# Altium PCB RIO_rev1.PcbDoc
Units mil, origin at the board's own origin, x right, y up, seen from the top; angles counter-clockwise.
Board outline 3937.01 x 3937.01 mil, 4 copper layers (Top, Plane 1, Plane 2, Bottom), stack 59.291 mil thick; 2 components, 147 nets, 4 pads, 0 vias.
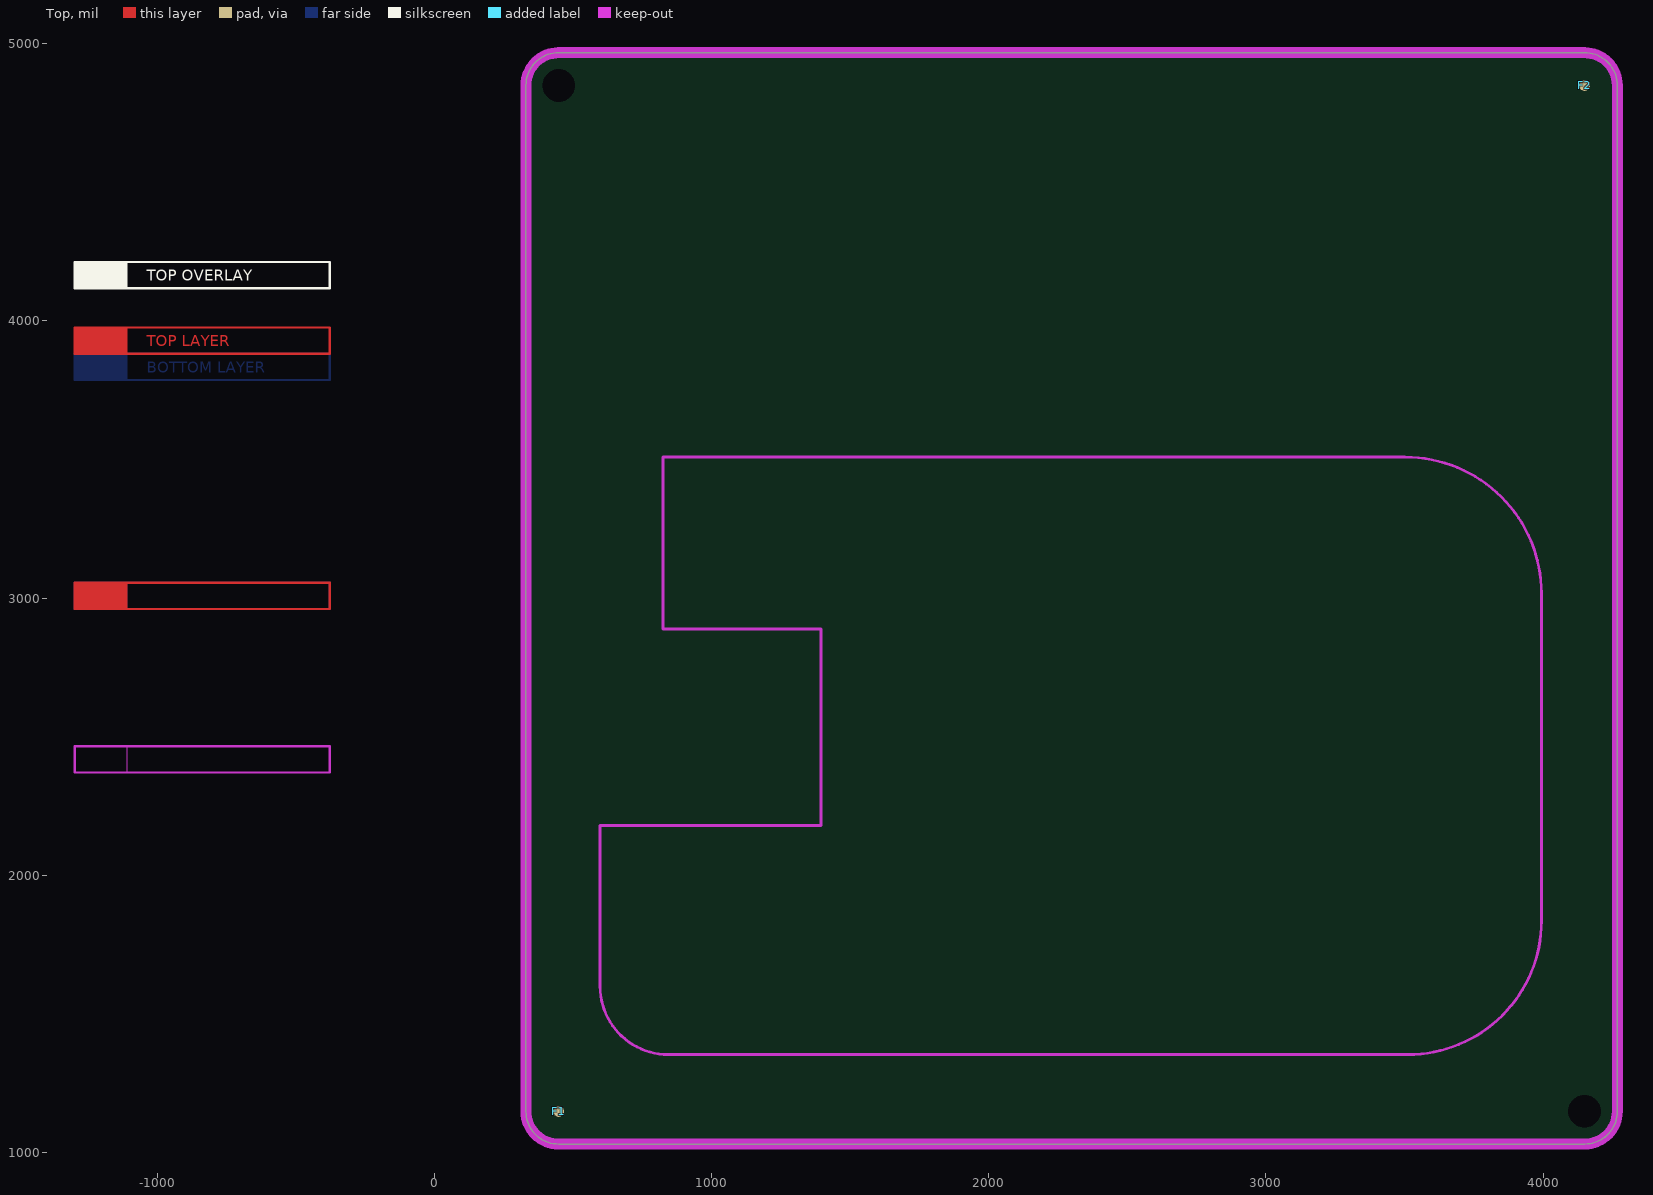
[diagram p0: Top view]
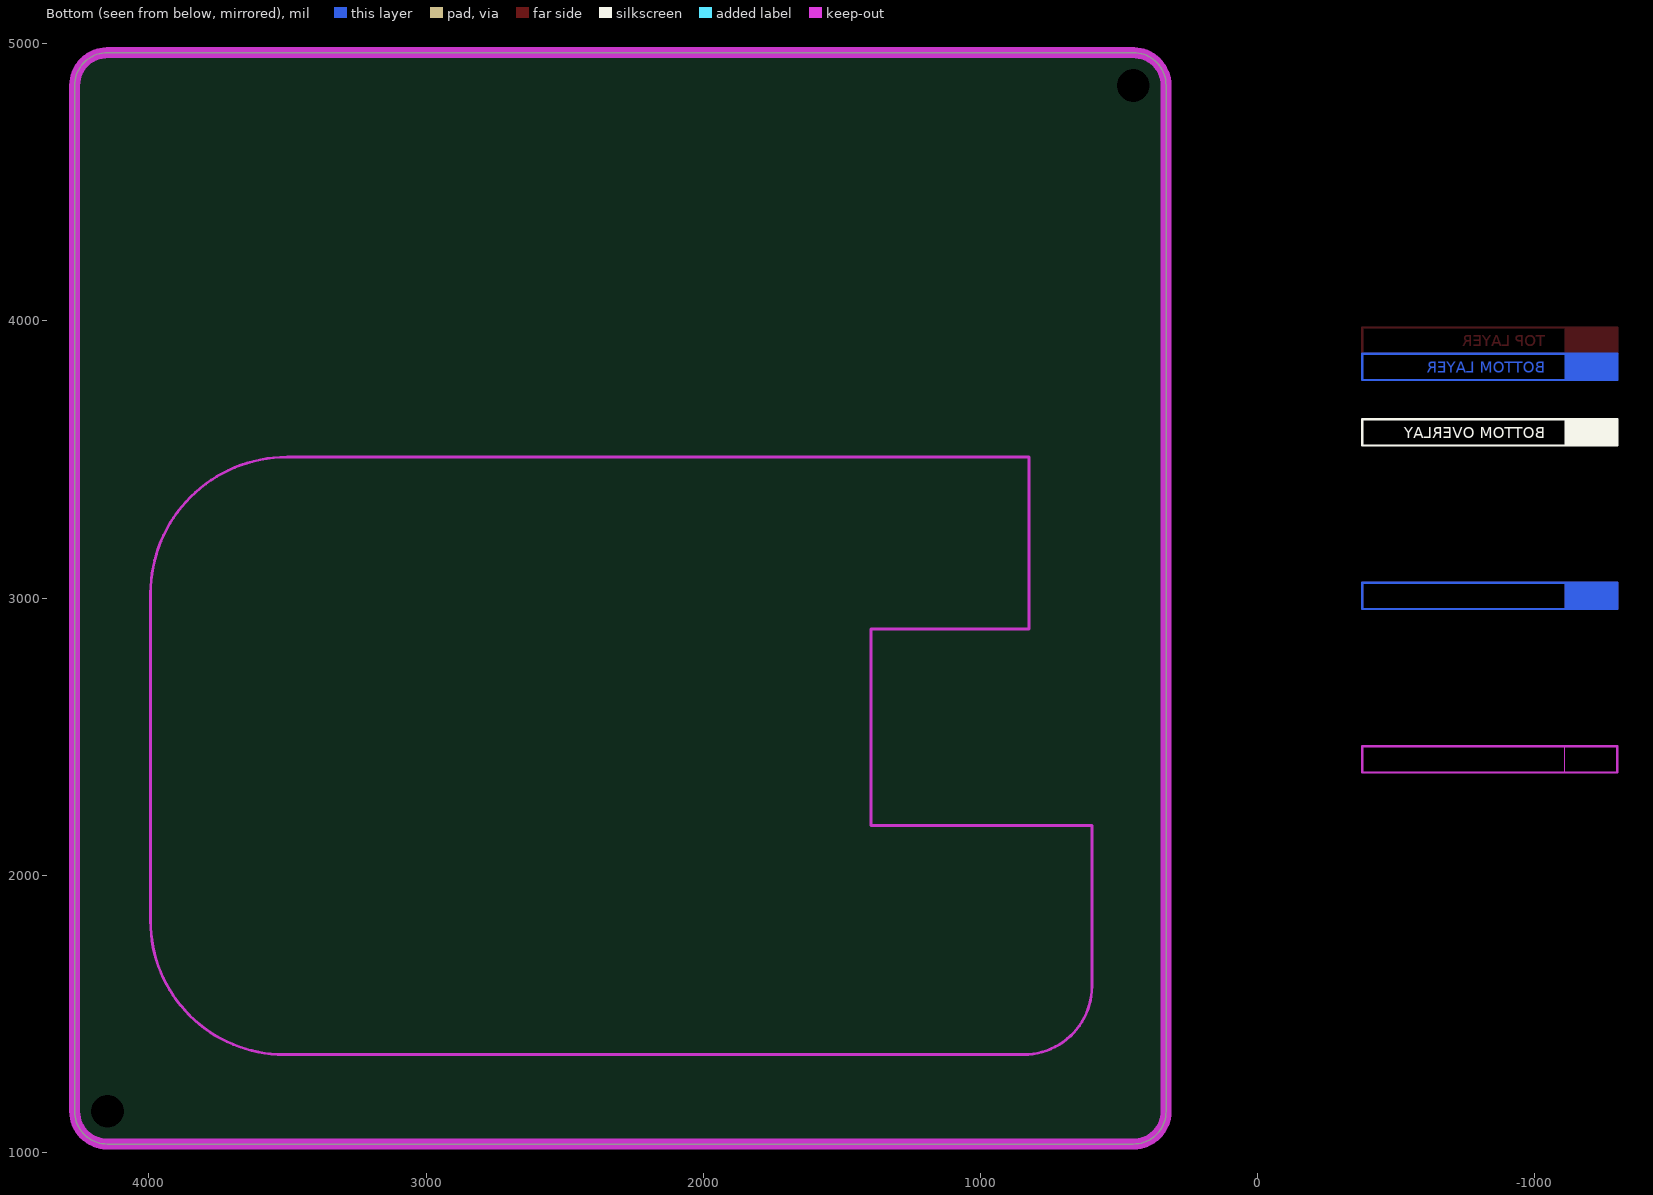
[diagram p1: Bottom view, seen from below]
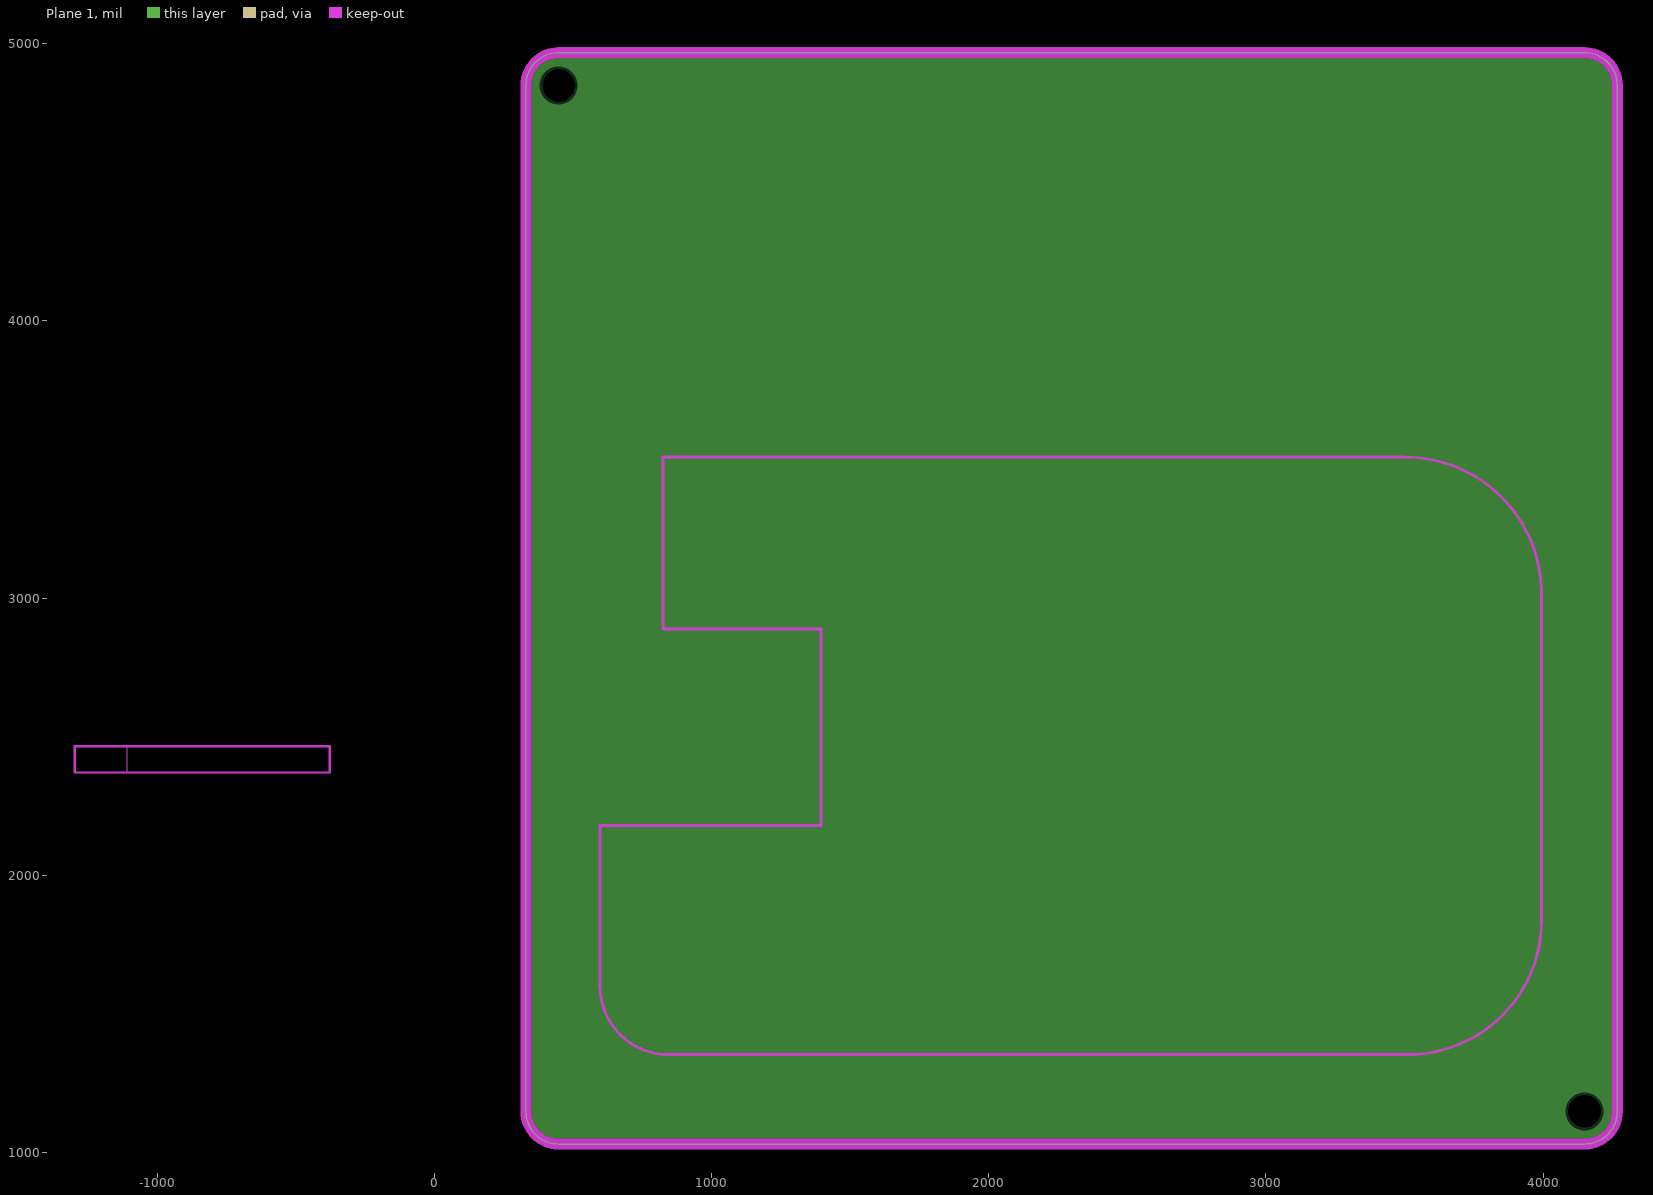
[diagram p2: Plane 1, clearances drawn from the general rule]
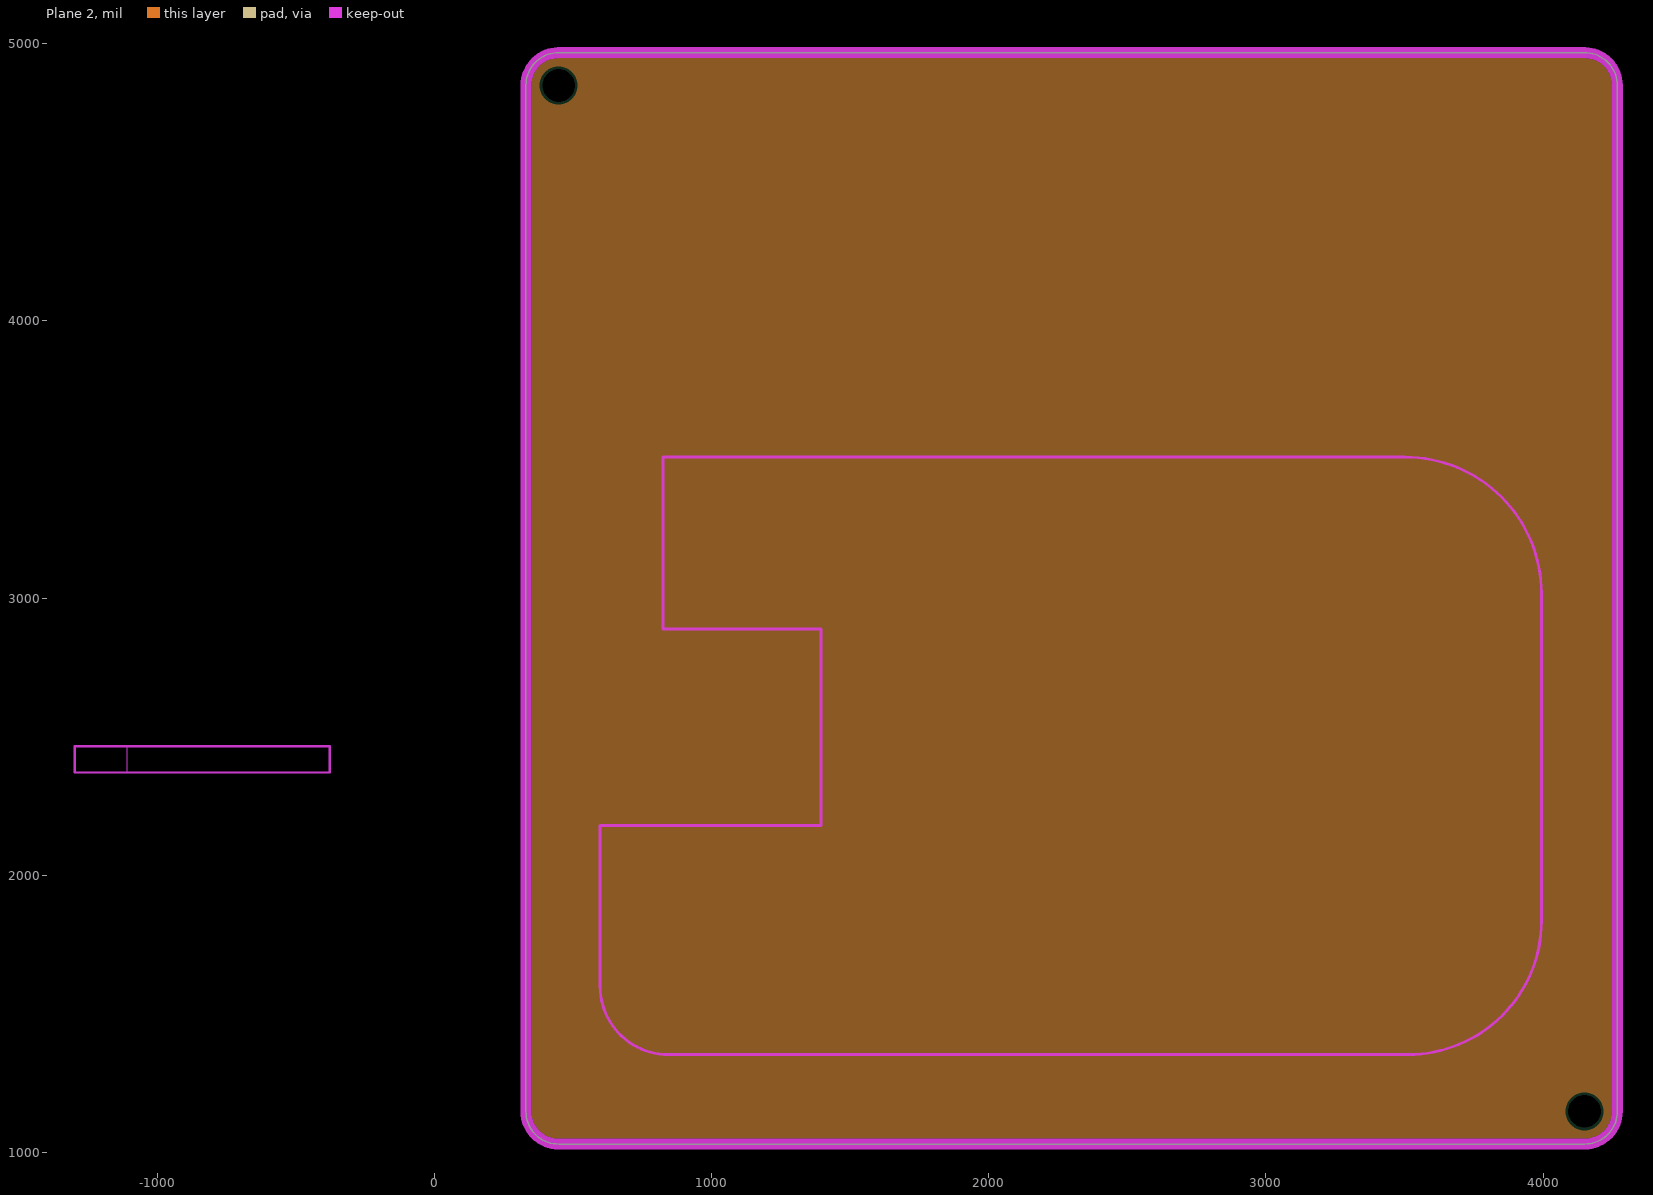
[diagram p3: Plane 2, clearances drawn from the general rule]

## Layer stack, top to bottom
Top Solder: solder mask 0.4, Solder Resist, Dk 3.5
Top: signal copper 1.378
Dielectric1: core 7.874, FR-4, Dk 4.58
Plane 1: plane copper 0.7087
Dielectric2: prepreg 39.3701, FR-4, Dk 4.58
Plane 2: plane copper 0.7087
Dielectric3: core 7.874, FR-4, Dk 4.58
Bottom: signal copper 1.378
Bottom Solder: solder mask 0.4, Solder Resist, Dk 3.5

## Board outline
330.71,1148.62 330.71,4849.41 cw(c448.82,4849.41) 448.82,4967.52 4149.61,4967.52 cw(c4149.61,4849.41) 4267.72,4849.41 4267.72,1148.62 cw(c4149.61,1148.62) 4149.61,1030.51 448.82,1030.51 cw(c448.82,1148.62)

## Design rules (kind name [scope] priority, off if disabled: settings)
AcuteAngle [All] p1: minimum=4.50000000000000E+0001 checktracksonly=FALSE
AssemblyTestPointUsage [All] p1 off:
AssemblyTestpoint [All] p1 off: testpointundercomponent=TRUE minsize=40 maxsize=100 preferedsize=60 minholesize=0 maxholesize=40 preferedholesize=32 testpointgrid=1 usegrid=TRUE gridtolerance=0.01 allowsidetop=TRUE allowsidebottom=TRUE
Clearance ClearanceViaPad [IsVia vs IsPad] p1: gap=3.94 ignorepadtopadclearanceinfootprint=FALSE except(0: Arc-Hole Track-Hole SMDPad-Hole THPad-Hole Via-Hole Fill-Hole Poly-Hole Region-Hole Text-Hole)
Clearance ClearanceGNDpolygons [InPolygonClass('GNDpolygons')] p2: gap=11.81 ignorepadtopadclearanceinfootprint=FALSE except(0: Arc-Hole Track-Hole SMDPad-Hole THPad-Hole Via-Hole Fill-Hole Poly-Hole Region-Hole Text-Hole)
Clearance ClearanceTechnology [All] p3: gap=7.87 ignorepadtopadclearanceinfootprint=FALSE except(0: Arc-Hole Track-Hole SMDPad-Hole THPad-Hole Via-Hole Fill-Hole Poly-Hole Region-Hole Text-Hole)
FabricationTestPointUsage [All] p1 off: valid=0 allowmultiple=FALSE
FabricationTestpoint [All] p1 off: side=3 testpointundercomponent=TRUE minsize=40 maxsize=100 preferedsize=60 minholesize=0 maxholesize=40 preferedholesize=32 testpointgrid=1 allowsidetop=TRUE allowsidebottom=TRUE usegrid=TRUE gridtolerance=0.01
HoleSize [All] p1: absolutevalues=TRUE maxlimit=240 minlimit=7 maxpercent=80.000 minpercent=20.000
MinimumAnnularRing [All] p1: minimumring=7.87
MinimumSolderMaskSliver [All] p1: minsoldermaskwidth=0
PlaneClearance [All] p1: clearance=9.84
PlaneConnect [All] p1: planeconnectstyle=Relief reliefexpansion=20 reliefentries=4 reliefconductorwidth=10 reliefairgap=10
PolygonConnect PolygonConnectVia [IsVia] p1: connectstyle=Direct reliefconductorwidth=15.75 reliefentries=4 polygonreliefangle="90 Angle" airgapwidth=10
PolygonConnect PolygonConnectBigPads [(ObjectKind = 'Pad') And ((AsMM(PadXSize_AllLayers) > 2) Or (AsMM(PadYSize_AllLayers) > 2))] p2: connectstyle=Direct reliefconductorwidth=15.75 reliefentries=4 polygonreliefangle="90 Angle" airgapwidth=10
PolygonConnect PolygonConnectGeneral [All] p3: connectstyle=Relief reliefconductorwidth=11.81 reliefentries=4 polygonreliefangle="90 Angle" airgapwidth=7.87
RoutingVias [All] p1: holewidth=23.62 width=47.24 viastyle="Through Hole" minholewidth=11.81 minwidth=27.56 maxholewidth=35.43 maxwidth=55.12
SilkToSilkClearance [All] p1: silktosilkclearance=5.91
SilkToSolderMaskClearance SilkscreenOverComponentPads [IsPad] p1: minsilkscreentomaskgap=3.94 clearancetoexposedcopper=FALSE
SolderMaskExpansion [All] p1: expansion=3.94
Width WidthTechnology [All] p1: maxlimit=30 minlimit=5 preferedwidth=10
20 further rules are at their usual default settings.

## Components (designator, comment, footprint, x,y, rotation, side; value= is the part's Value field where it differs from the comment)
F1 "Fiducial" FIDUCIAL 448.82,1148.62 r90 top locked
F2 "Fiducial" FIDUCIAL 4149.61,4849.41 r90 top locked

## Footprints (in the part's own frame and the unit in brackets; to place one, negate y for a bottom-side part, rotate by r counter-clockwise, add the part's x,y. Pads: shape width x height; smd on the part's side, far side on the other; paste and mask are expansions set on the pad)
FIDUCIAL [mm] "Fiducial"
  round 1 smd paste-1 mask+0.5: ""(0,0)
  body extent -0.49,-0.5 0.5,0.5, height 0.5

## Free pads (board coordinates)
  round 39.37 hole 118.11: 0(448.82,4849.41) 0(4149.61,1148.62)

## Nets (pads, with @x,y where several pads share a name; then routed paths per layer and width w, separated by ;. In a path a pad name is that pad's centre, name@x,y a point inside that pad or via, vN(x,y) a via of type N, cw(c..) or ccw(c..) an arc to the next point about the centre after c; other vN are vias at no path point)
3.3V: 
5V: 
"5V GND": 
12V: 
"12V GND": 
ACT-12V-1: 
ACT-12V-2: 
ACT-12V-3: 
ACT-12V-4: 
ACT-12V-5: 
ACT-12V-6: 
ACT-12V-7: 
ACT-12V-8: 
ACT-GND-1: 
ACT-GND-2: 
ACT-GND-3: 
ACT-GND-4: 
ACT-GND-5: 
ACT-GND-6: 
ACT-GND-7: 
ACT-GND-8: 
ADC_IN: 
DO: 
GND: 
Net_1: 
NetR1_2: 
PA0: 
PA1: 
PA2: 
PA3: 
PA4: 
PA5: 
PA6: 
PA7: 
PA8: 
PA9: 
PA10: 
PA11: 
PA12: 
PA13: 
PA14: 
PA15: 
PB0: 
PB1: 
PB2: 
PB3: 
PB4: 
PB5: 
PB6: 
PB7: 
PB8: 
PB9: 
PB10: 
PB11: 
PB12: 
PB13: 
PB14: 
PB15: 
PC0: 
PC1: 
PC2: 
PC3: 
PC4: 
PC5: 
PC6: 
PC7: 
PC8: 
PC9: 
PC10: 
PC11: 
PC12: 
PC13: 
PC14: 
PC15: 
PD0: 
PD1: 
PD2: 
PD3: 
PD4: 
PD5: 
PD6: 
PD7: 
PD8: 
PD9: 
PD10: 
PD11: 
PD12: 
PD13: 
PD14: 
PD15: 
PE0: 
PE1: 
PE2: 
PE3: 
PE4: 
PE5: 
PE6: 
PE7: 
PE8: 
PE9: 
PE10: 
PE11: 
PE12: 
PE13: 
PE14: 
PE15: 
PT-GND-1: 
PT-GND-2: 
PT-GND-3: 
PT-GND-4: 
PT-GND-5: 
PT-GND-6: 
PT-GND-7: 
PT-GND-8: 
PT-PWR-1: 
PT-PWR-2: 
PT-PWR-3: 
PT-PWR-4: 
PT-PWR-5: 
PT-PWR-6: 
PT-PWR-7: 
PT-PWR-8: 
PT-SIG-1: 
PT-SIG-2: 
PT-SIG-3: 
PT-SIG-4: 
PT-SIG-5: 
PT-SIG-6: 
PT-SIG-7: 
PT-SIG-8: 
PT_OUT: 
TC-IN-1: 
TC-IN-2: 
TC-IN-3: 
TC-IN-4: 
TC-IN-5: 
TC-IN-6: 
TC-IN-7: 
TC-IN-8: 
TC-OUT-1: 
TC-OUT-2: 
TC-OUT-3: 
TC-OUT-4: 
TC-OUT-5: 
TC-OUT-6: 
TC-OUT-7: 
TC-OUT-8: 
pads on no net: F1. F2.
copper on no net: | length 4060
  Top w7.87: -1296.95,3881.46 -1296.95,3976.46 -376.95,3976.46 -376.95,3881.46 -1296.95,3881.46
  Bottom w7.87: -1296.95,3786.46 -1296.95,3881.46 -376.95,3881.46 -376.95,3786.46 -1296.95,3786.46

## Polygon pours and split planes (outlines as drawn)
no net on Plane 1 (split plane): 4158.18,4947.45 4166.7,4946.33 4175.08,4944.47 4183.27,4941.89 4191.2,4938.61 4198.82,4934.64 4206.06,4930.03 4212.87,4924.8 4219.2,4919 4225,4912.67 4230.23,4905.86 4234.84,4898.62 4238.8,4891 4242.09,4883.07 4244.67,4874.88 4246.53,4866.5 4247.65,4857.99 4248,4850.03 4247.94,4849.41 4247.94,1148.62 4248,1148 4247.65,1140.04 4246.53,1131.53 4244.67,1123.15 4242.09,1114.96 4238.8,1107.03 4234.84,1099.41 4230.23,1092.17 4225,1085.36 4219.2,1079.03 4212.87,1073.23 4206.06,1068 4198.82,1063.39 4191.2,1059.42 4183.27,1056.14 4175.08,1053.56 4166.7,1051.7 4158.18,1050.58 4150.23,1050.23 4149.61,1050.29 448.82,1050.29 448.19,1050.23 440.24,1050.58 431.73,1051.7 423.35,1053.56 415.16,1056.14 407.23,1059.42 399.61,1063.39 392.37,1068 385.56,1073.23 379.23,1079.03 373.43,1085.36 368.2,1092.17 363.59,1099.41 359.62,1107.03 356.34,1114.96 353.75,1123.15 351.9,1131.53 350.77,1140.04 350.43,1148 350.49,1148.62 350.49,4849.41 350.43,4850.03 350.77,4857.99 351.9,4866.5 353.75,4874.88 356.34,4883.07 359.62,4891 363.59,4898.62 368.2,4905.86 373.43,4912.67 379.23,4919 385.56,4924.8 392.37,4930.03 399.61,4934.64 407.23,4938.61 415.16,4941.89 423.35,4944.47 431.73,4946.33 440.24,4947.45 448.19,4947.8 448.82,4947.74 4149.61,4947.74 4150.23,4947.8
no net on Plane 2 (split plane): 4158.18,4947.45 4166.7,4946.33 4175.08,4944.47 4183.27,4941.89 4191.2,4938.61 4198.82,4934.64 4206.06,4930.03 4212.87,4924.8 4219.2,4919 4225,4912.67 4230.23,4905.86 4234.84,4898.62 4238.8,4891 4242.09,4883.07 4244.67,4874.88 4246.53,4866.5 4247.65,4857.99 4248,4850.03 4247.94,4849.41 4247.94,1148.62 4248,1148 4247.65,1140.04 4246.53,1131.53 4244.67,1123.15 4242.09,1114.96 4238.8,1107.03 4234.84,1099.41 4230.23,1092.17 4225,1085.36 4219.2,1079.03 4212.87,1073.23 4206.06,1068 4198.82,1063.39 4191.2,1059.42 4183.27,1056.14 4175.08,1053.56 4166.7,1051.7 4158.18,1050.58 4150.23,1050.23 4149.61,1050.29 448.82,1050.29 448.19,1050.23 440.24,1050.58 431.73,1051.7 423.35,1053.56 415.16,1056.14 407.23,1059.42 399.61,1063.39 392.37,1068 385.56,1073.23 379.23,1079.03 373.43,1085.36 368.2,1092.17 363.59,1099.41 359.62,1107.03 356.34,1114.96 353.75,1123.15 351.9,1131.53 350.77,1140.04 350.43,1148 350.49,1148.62 350.49,4849.41 350.43,4850.03 350.77,4857.99 351.9,4866.5 353.75,4874.88 356.34,4883.07 359.62,4891 363.59,4898.62 368.2,4905.86 373.43,4912.67 379.23,4919 385.56,4924.8 392.37,4930.03 399.61,4934.64 407.23,4938.61 415.16,4941.89 423.35,4944.47 431.73,4946.33 440.24,4947.45 448.19,4947.8 448.82,4947.74 4149.61,4947.74 4150.23,4947.8

## Keep-outs
Keep-Out Layer:
  rectangle: -1296.95,2370.46 -1106.95,2465.46
  lines w7.87: -1296.95,2370.46 -1296.95,2465.46 -376.95,2465.46 -376.95,2370.46 -1296.95,2370.46
  lines w10: 598.43,1599.42 ccw(c844.49,1599.41) 844.49,1353.35 ; 598.43,1599.42 ccw(c844.49,1599.41) 844.49,1353.35 ; 598.43,1599.42 598.43,2180.12 ; 598.43,1599.42 598.43,2180.12 ; 598.43,2180.12 1395.67,2180.12 ; 598.43,2180.12 1395.67,2180.12 ; 824.81,2888.79 824.81,3508.86 ; 824.81,2888.79 1395.67,2888.79 ; 824.81,2888.79 1395.67,2888.79 ; 824.81,2888.79 824.81,3508.86 ; 824.81,3508.86 3501.97,3508.86 ; 824.81,3508.86 3501.97,3508.86 ; 844.49,1353.35 3511.81,1353.35 ; 844.49,1353.35 3511.81,1353.35 ; 1395.67,2180.12 1395.67,2888.79 ; 1395.67,2180.12 1395.67,2888.79 ; 3501.97,3508.86 cw(c3501.97,3016.73) 3994.1,3016.74 ; 3501.97,3508.86 cw(c3501.97,3016.73) 3994.1,3016.74 ; 3511.81,1353.35 ccw(c3511.81,1835.64) 3994.1,1835.64 ; 3511.81,1353.35 ccw(c3511.81,1835.64) 3994.1,1835.64 ; 3994.1,1835.64 3994.1,3016.74 ; 3994.1,1835.64 3994.1,3016.74
  lines w39.37: 448.82,4967.52 ccw(c448.82,4849.41) 330.71,4849.41 330.71,1148.62 ccw(c448.82,1148.62) 448.82,1030.51 4149.61,1030.51 ccw(c4149.61,1148.62) 4267.72,1148.62 ; 448.82,4967.52 448.82,4967.52 ; 448.82,4967.52 4149.61,4967.52 ; 4149.61,4967.52 cw(c4149.61,4849.41) 4267.72,4849.41 ; 4149.61,4967.52 4149.61,4967.52 ; 4267.72,1148.62 4267.72,4849.41 ; 4267.72,1148.62 4267.72,1148.62 ; 4267.72,4849.41 4267.72,4849.41
  text "ROUTING KEEPOUT LAYER" at -1036.95,2397.46 h35

## Other copper
Top:
  rectangle: -1296.95,3881.46 -1106.95,3976.46
  text "TOP LAYER" at -1036.95,3908.46 h40
Bottom:
  rectangle: -1296.95,3786.46 -1106.95,3881.46
  text "BOTTOM LAYER" at -1036.95,3813.46 h40
Multi-Layer:
  rectangle: -1296.95,2960.46 -1106.95,3055.46
  lines w7.87: -1296.95,2960.46 -1296.95,3055.46 -376.95,3055.46 -376.95,2960.46 -1296.95,2960.46
  text "MULTILAYER" at -1036.95,2987.46 h40

## Silkscreen, mask and mechanical layers (free items; w line width, h text height)
Top Overlay:
  rectangle: -1296.95,4117.46 -1106.95,4212.46
  lines w7.87: -1296.95,4117.46 -376.95,4117.46 -376.95,4212.46 -1296.95,4212.46 -1296.95,4117.46
  text "TOP OVERLAY" at -1036.95,4144.47 h40
Bottom Overlay:
  rectangle: -1296.95,3550.46 -1106.95,3645.46
  lines w7.87: -1296.95,3550.46 -376.95,3550.46 -376.95,3645.46 -1296.95,3645.46 -1296.95,3550.46
  text "BOTTOM OVERLAY" at -1036.95,3577.46 h40
Top Paste:
  rectangle: -1296.95,4235.46 -1106.95,4330.46
  lines w7.87: -1296.95,4235.46 -1296.95,4330.46 -376.95,4330.46 -376.95,4235.46 -1296.95,4235.46
  text "TOP PASTE" at -1036.95,4262.46 h40
Bottom Paste:
  rectangle: -1296.95,3432.46 -1106.95,3527.46
  lines w7.87: -1296.95,3432.46 -1296.95,3527.46 -376.95,3527.46 -376.95,3432.46 -1296.95,3432.46
  text "BOTTOM PASTE" at -1036.95,3459.46 h40
Top Solder:
  rectangle: -1296.95,3999.46 -1106.95,4094.46
  lines w7.87: -1296.95,3999.46 -376.95,3999.46 -376.95,4094.46 -1296.95,4094.46 -1296.95,3999.46
  text "TOP SOLDER MASK" at -1036.95,4026.46 h40
Bottom Solder:
  rectangle: -1296.95,3668.46 -1106.95,3763.46
  lines w7.87: -1296.95,3668.46 -1296.95,3763.46 -376.95,3763.46 -376.95,3668.46 -1296.95,3668.46
  text "BOTTOM SOLDER MASK" at -1036.95,3695.46 h40
Drill Guide:
  rectangle: -1296.95,3314.46 -1106.95,3409.46
  lines w7.87: -1296.95,3314.46 -376.95,3314.46 -376.95,3409.46 -1296.95,3409.46 -1296.95,3314.46
  text "DRILL GUIDE (SLOTS)" at -1036.95,3341.47 h40
Outline:
  rectangle: -1296.95,3078.46 -1106.95,3173.46
  lines w3.94: 330.71,1148.62 ccw(c448.82,1148.62) 448.82,1030.51 4149.61,1030.51 ccw(c4149.61,1148.62) 4267.72,1148.62 4267.72,4849.41 ccw(c4149.61,4849.41) 4149.61,4967.52 448.82,4967.52 ccw(c448.82,4849.41) 330.71,4849.41 330.71,1148.62
  lines w7.87: -1296.95,3078.46 -376.95,3078.46 -376.95,3173.46 -1296.95,3173.46 -1296.95,3078.46
  lines w9.84: 5209.61,119.09 10329.76,119.09 ; 5209.61,282.28 10329.76,282.28 ; 5149.61,-928.15 ccw(c5202.76,-928.15) 5202.76,-981.3 10336.61,-981.3 ccw(c10336.61,-928.15) 10389.76,-928.15 10389.76,426.18 ccw(c10336.61,426.18) 10336.61,479.33 5202.76,479.33 ccw(c5202.76,426.18) 5149.61,426.18 5149.61,-928.15
  lines w10: -1396.95,5664.45 3047.24,5664.45 3047.24,5439.96 ; -1396.95,5866.22 3047.24,5866.22 3047.24,5642.17 ; -1206.95,4420.46 -436.95,4420.46 ; 1629.92,5439.96 1629.92,5664.45 ; 3047.24,5866.14 4069.88,5866.14 ; -1396.95,2283.46 -1396.95,4640.46 -266.95,4640.46 -266.95,2283.46 -1396.95,2283.46 ; -1396.95,5439.96 -1396.95,6150.59 4070.87,6150.59 4070.87,5439.96 -1396.95,5439.96
  text ".GlobalProjectName" at -934.06,5950.79 h118.11
  text "Project:" at -1338.84,5944.53 h47.24
  text ".GlobalProjectTeam" at -1033.46,5727.36 h80
  text ".GlobalProjectLink" at 1714.57,5727.36 h80
  text "Team:" at -1338.84,5724.41 h47.24
  text "More info:" at 1328.74,5724.41 h47.24
  text ".GlobalProjectRevision" at 3283.46,5518.7 h196.85
  text ".Pcb_File_Name_No_Path" at -771.65,5516.1 h80
  text "PCB file name:" at -1338.84,5515.04 h47.24
  text ".GlobalRevisionDate" at 2225.14,5499.28 h80
  text "Rev:" at 3125.98,5499.28 h47.24
  text "Revision date:" at 1706.44,5495.36 h47.24
  text "LAYER USAGE" at -1206.95,4448.46 h80
  text "Fusion service size limits" at 5488.19,4062.01 h196.85
  text "5cm X 5cm" at 5606.3,3865.24 h196.85
  text "5cm X 10cm" at 5606.3,3716.5 h196.85
  text "5cm X 15cm" at 5606.3,3567.76 h196.85
  text "5cm X 20cm" at 5606.3,3419.02 h196.85
  text "10cm X 10cm" at 5606.3,3270.28 h196.85
  text "10cm X 15cm" at 5606.3,3121.54 h196.85
  text "BOARD OUTLINE" at -1036.95,3105.46 h40
  text "10cm X 20cm" at 5606.3,2972.8 h196.85
  text "15cm X 15cm" at 5606.3,2824.06 h196.85
  text "15cm X 20cm" at 5606.3,2675.32 h196.85
  text "20cm X 20cm" at 5606.3,2526.57 h196.85
  text "Set Net names for internal plane layers in Design » Layer Stack Manager" at 5212.6,1502.95 h196.85
  text "Layer Stack Up Detail for: 4 Layer Seed Fusion template.PcbDoc" at 5209.61,325.89 h74.8
  text "Layer" at 5209.61,221.26 h37.4
  text "Gerber" at 6294.96,221.26 h37.4
  text "Copper" at 6857.77,221.26 h37.4
  text "Dielectric" at 7481.66,221.26 h37.4
  text "Dielectric" at 8131.71,221.26 h37.4
  text "Dielectric" at 8951.4,221.26 h37.4
  text "Dielectric" at 9601.46,221.26 h37.4
  text "Name" at 5209.61,146.46 h37.4
  text "Document" at 6294.96,146.46 h37.4
  text "Thickness" at 6857.77,146.46 h37.4
  text "Height" at 7481.66,146.46 h37.4
  text "Material" at 8131.71,146.46 h37.4
  text "Constant" at 8951.4,146.46 h37.4
  text "Type" at 9601.46,146.46 h37.4
  text "Top Solder Mask" at 5209.61,38.1 h53.15
  text "(.GTS)" at 6294.96,38.1 h53.15
  text "0.0102mm" at 7481.66,38.1 h53.15
  text "Solder Resist" at 8131.71,38.1 h53.15
  text "3.50" at 8951.4,38.1 h53.15
  text "Top" at 5209.61,-114.05 h53.15
  text "(.GTL)" at 6294.96,-114.05 h53.15
  text "0.035mm" at 6857.77,-114.05 h53.15
  text "0.2mm" at 7481.66,-190.12 h53.15
  text "FR-4" at 8131.71,-190.12 h53.15
  text "4.58" at 8951.4,-190.12 h53.15
  text "Core" at 9601.46,-190.12 h53.15
  text "Plane 1" at 5209.61,-266.2 h53.15
  text "(.GP1)" at 6294.96,-266.2 h53.15
  text "0.018mm" at 6857.77,-266.2 h53.15
  text "1mm" at 7481.66,-342.27 h53.15
  text "FR-4" at 8131.71,-342.27 h53.15
  text "4.58" at 8951.4,-342.27 h53.15
  text "PrePreg" at 9601.46,-342.27 h53.15
  text "Plane 2" at 5209.61,-418.35 h53.15
  text "(.GP2)" at 6294.96,-418.35 h53.15
  text "0.018mm" at 6857.77,-418.35 h53.15
  text "0.2mm" at 7481.66,-494.42 h53.15
  text "FR-4" at 8131.71,-494.42 h53.15
  text "4.58" at 8951.4,-494.42 h53.15
  text "Core" at 9601.46,-494.42 h53.15
  text "Bottom" at 5209.61,-570.5 h53.15
  text "(.GBL)" at 6294.96,-570.5 h53.15
  text "0.035mm" at 6857.77,-570.5 h53.15
  text "Bottom Solder Mask" at 5209.61,-722.65 h53.15
  text "(.GBS)" at 6294.96,-722.65 h53.15
  text "0.0102mm" at 7481.66,-722.65 h53.15
  text "Solder Resist" at 8131.71,-722.65 h53.15
  text "3.50" at 8951.4,-722.65 h53.15
Dimensions:
  rectangle: -1296.95,2488.46 -1106.95,2583.46
  lines w7.87: -1289.22,603.98 -577.22,603.98 ; -1286.22,920.98 -574.22,920.98 ; -1286.22,1674.98 -574.22,1674.98 ; -1285.22,1371.98 -573.22,1371.98 ; -1280.22,1809.98 -568.22,1809.98 ; -1296.95,2488.46 -376.95,2488.46 -376.95,2583.46 -1296.95,2583.46 -1296.95,2488.46
  lines w10: -1325.34,329.72 -1325.34,1958.98 -374.34,1958.98 -374.34,329.72 -1325.34,329.72
  text "DIMENSIONS" at -1036.95,2515.47 h40
  text "BUILD STATISTICS" at -1276.22,1840.98 h60
  text "GENERAL" at -1284.22,1694.98 h40
  text ".Net_Count" at -903.22,1611.98 h40
  text "NETS" at -1281.22,1609.98 h35
  text ".Component_Count" at -903.22,1529.98 h40
  text "COMPONENTS" at -1280.22,1528.98 h35
  text "PRIMITIVES" at -1283.22,1391.98 h40
  text ".Fill_Count" at -903.22,1307.98 h40
  text "FILLS" at -1280.22,1306.98 h35
  text ".Track_Count" at -903.22,1226.98 h40
  text "TRACKS" at -1280.22,1224.98 h35
  text ".String_Count" at -903.22,1144.98 h40
  text "STRINGS" at -1280.22,1142.98 h35
  text ".Arc_Count" at -903.22,1061.98 h40
  text "ARC'S" at -1280.22,1059.98 h35
  text "LANDS" at -1284.22,940.98 h40
  text ".Pad_Count" at -903.22,856.98 h40
  text ".Pad_Count" at -903.22,856.98 h40
  text "PADS" at -1280.22,854.98 h35
  text ".Via_Count" at -903.22,774.98 h40
  text "VIA'S" at -1279.22,773.98 h35
  text "PRINT SCALE" at -1287.22,623.98 h40
  text ".Print_Scale" at -905.22,538.98 h40
  text "SCALE" at -1282.22,537.98 h35
  text ".Print_Date" at -905.22,457.98 h40
  text "PRINT DATE" at -1281.22,456.98 h35
  text ".Print_Time" at -904.22,376.98 h40
  text "PRINT TIME" at -1280.22,375.98 h35
Assembly Top:
  rectangle: -1296.95,2842.46 -1106.95,2937.46
  lines w7.87: -1296.95,2842.46 -1296.95,2937.46 -376.95,2937.46 -376.95,2842.46 -1296.95,2842.46
  text "TOP ASSEMBLY" at -1036.95,2869.46 h40
Assembly Bot:
  rectangle: -1296.95,2724.46 -1106.95,2819.46
  lines w7.87: -1296.95,2724.46 -1296.95,2819.46 -376.95,2819.46 -376.95,2724.46 -1296.95,2724.46
  text "BOTTOM ASSEMBLY" at -1036.95,2751.47 h40
Drill Drawing:
  rectangle: -1296.95,3196.46 -1106.95,3291.46
  lines w7.87: -1296.95,3196.46 -1296.95,3291.46 -376.95,3291.46 -376.95,3196.46 -1296.95,3196.46
  lines w10: -13.4,-1719.5 53.27,-1719.5 53.27,-1652.83 -13.4,-1652.83 -13.4,-1719.5
  lines w15: -73.19,-1764.5 3805.78,-1764.5 ; -73.19,-1614.5 3805.78,-1614.5 ; 477.69,-1914.5 477.69,-1464.5 ; 1175.5,-1914.5 1175.5,-1464.5 ; 2521.1,-1914.5 2521.1,-1464.5 ; 3026.98,-1914.5 3026.98,-1464.5 ; -73.19,-1914.5 3805.78,-1914.5 3805.78,-1464.5 -73.19,-1464.5 -73.19,-1914.5
  text "DRILL DRAWING" at -1036.95,3223.46 h40
  text "Symbol" at 16.81,-1569.5 h72
  text "Hit Count" at 522.69,-1569.5 h72
  text "Finished Hole Size" at 1220.5,-1569.5 h72
  text "Plated" at 2566.1,-1569.5 h72
  text "Hole Type" at 3071.98,-1569.5 h72
  text "2" at 522.69,-1719.5 h60
  text "3.0mm" at 1220.5,-1719.5 h60
  text "PTH" at 2566.1,-1719.5 h60
  text "Round" at 3071.98,-1719.5 h60
  text "2 Total" at 522.69,-1869.5 h60

## Dimensions
4149.61,1030.51 to 4149.61,4967.52 on Dimensions
330.71,1148.62 to 4267.72,1148.62 on Dimensions